# Altium PCB PIN_Diod.PcbDoc
Units mm, origin at the board's own origin, x right, y up, seen from the top; angles counter-clockwise.
Board outline 53 x 34 mm, 2 copper layers (Top Layer, Bottom Layer); 14 components, 7 nets, 44 pads, 4 vias.
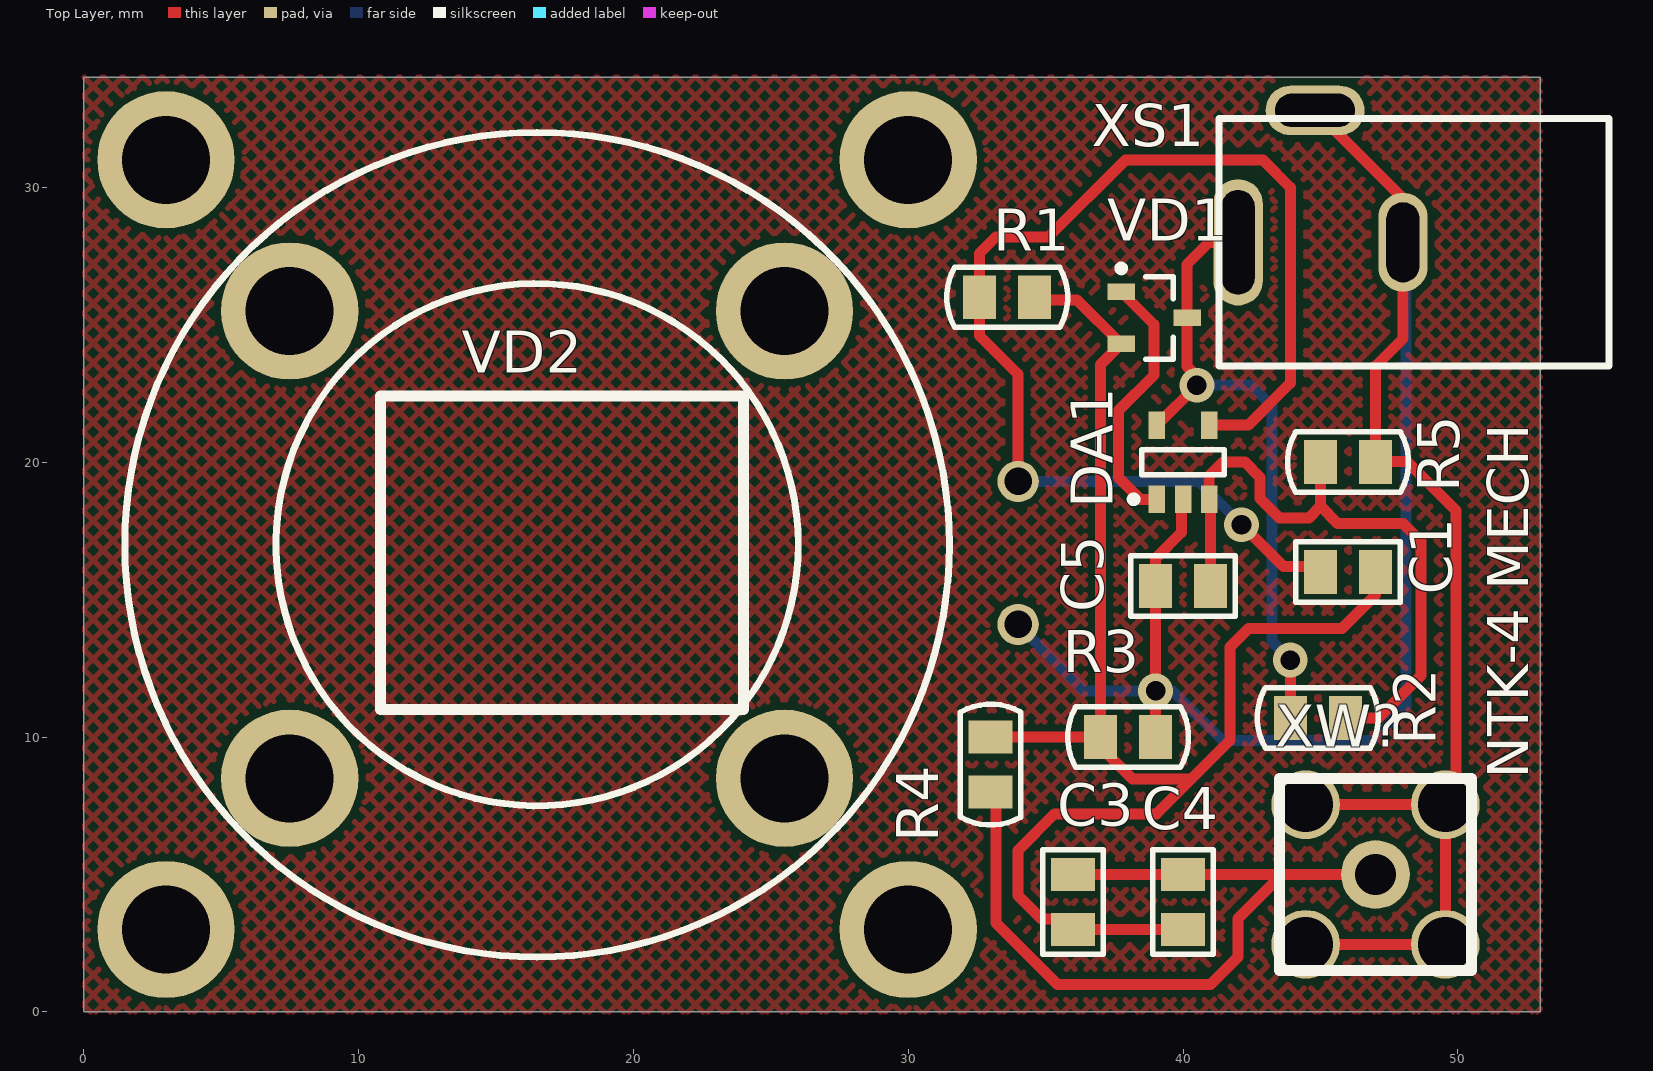
[diagram p0: Top Layer view]
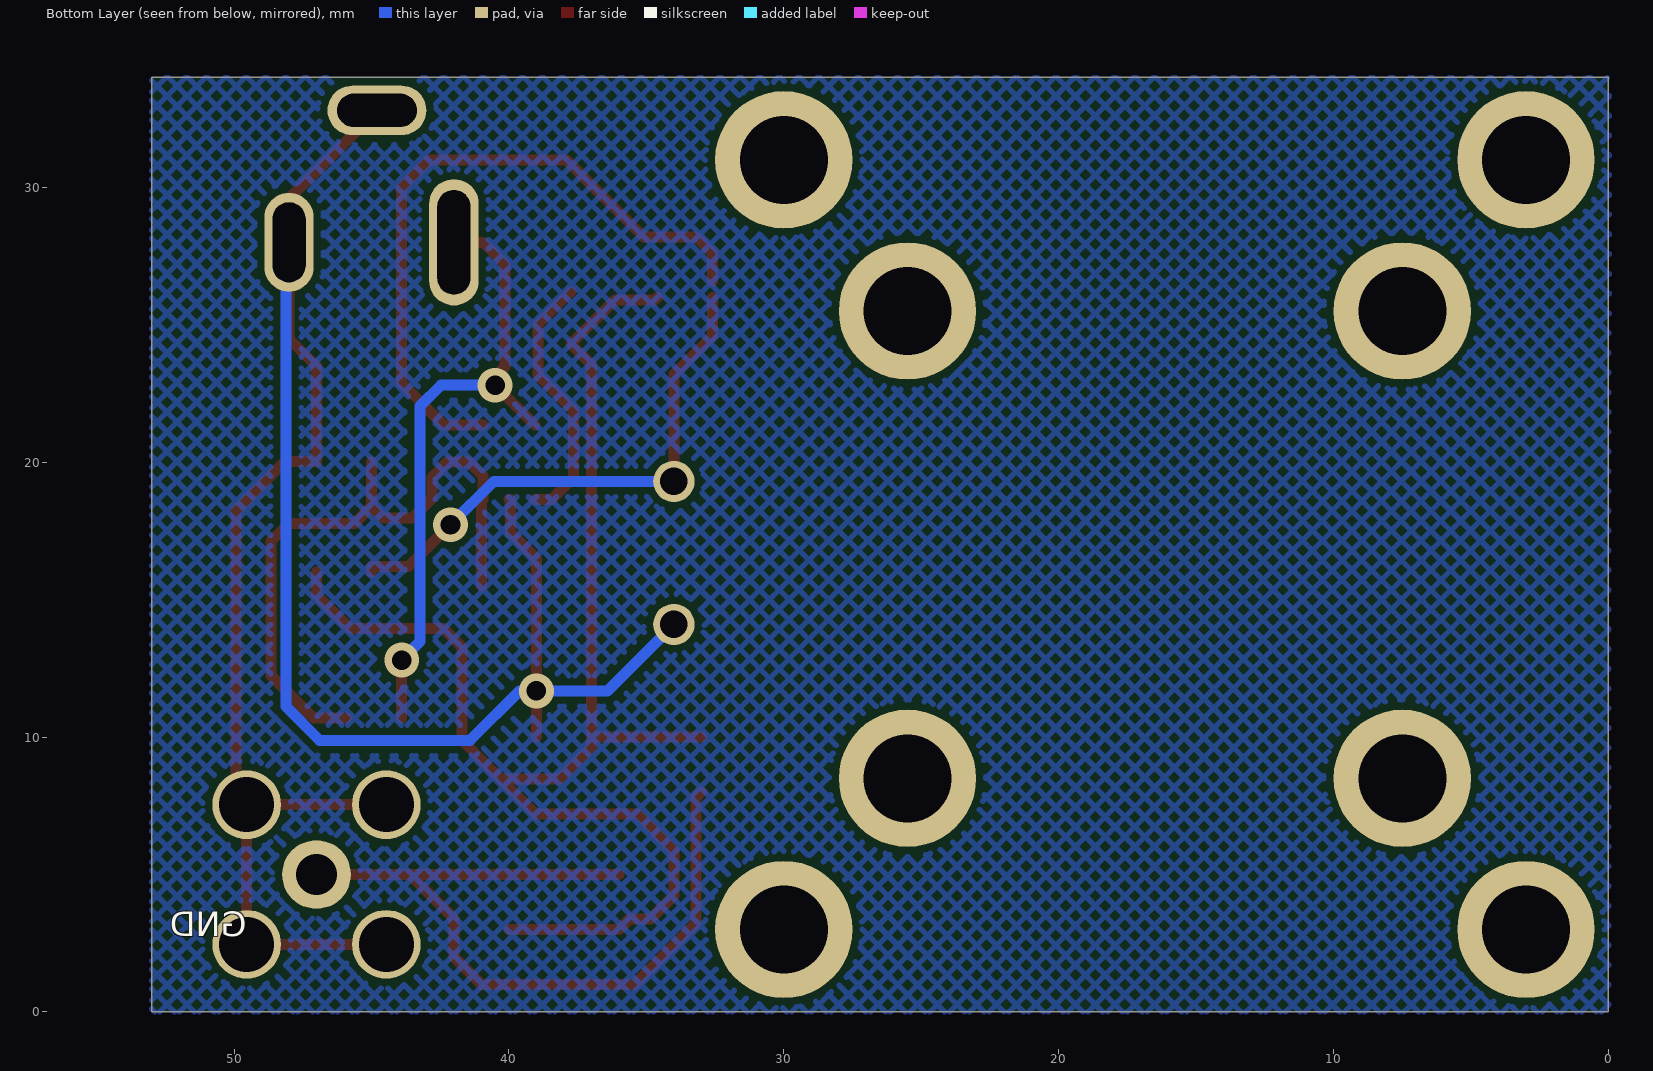
[diagram p1: Bottom Layer view, seen from below]
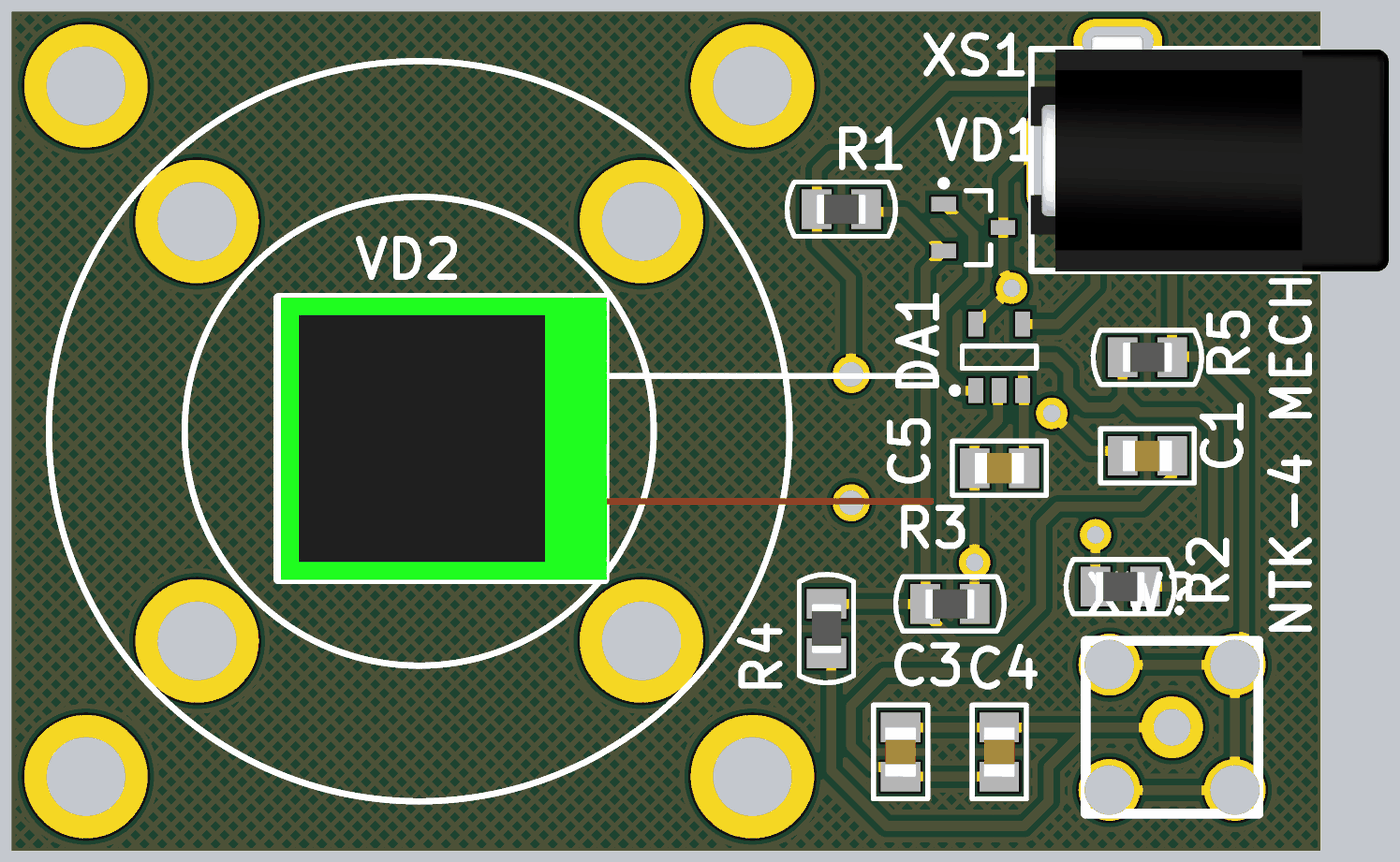
[diagram p2: 3D render of the assembled board from above, using the file's embedded part models]

## Layer stack, top to bottom
Top Solder: solder mask 0.0102, Solder Resist, Dk 3.5
Top Layer: signal copper 0.0356
Dielectric 1: dielectric 0.32, FR-4, Dk 4.8
Bottom Layer: signal copper 0.0356
Bottom Solder: solder mask 0.0102, Solder Resist, Dk 3.5

## Board outline
0,0 0,34 53,34 53,0

## Design rules (kind name [scope] priority, off if disabled: settings)
Clearance [All] p1: gap=0.254 ignorepadtopadclearanceinfootprint=FALSE except(0: Arc-Hole Track-Hole SMDPad-Hole THPad-Hole Via-Hole Fill-Hole Poly-Hole Region-Hole Text-Hole)
PolygonConnect [All] p1: connectstyle=Relief reliefconductorwidth=0.254 reliefentries=4 polygonreliefangle="90 Angle" airgapwidth=0.254
RoutingVias [All] p1: holewidth=0.711 width=1.27 viastyle="Through Hole" minholewidth=0.711 minwidth=1.27 maxholewidth=0.711 maxwidth=1.27
SolderMaskExpansion [All] p1: expansion=0.102 istentingtop=FALSE
Width [All] p1: maxlimit=0.5 minlimit=0.4 preferedwidth=0.4 minimp=50.000000 maximp=50.000000 favimp=50.000000
30 further rules are at their usual default settings.

## Components (designator, comment, footprint, x,y, rotation, side; value= is the part's Value field where it differs from the comment)
C1 "4,7pF" C0805 46,16 r0 top
C3 "68nF" C0805 36,4 r90 top
C4 "10uF" C0805 40,4 r90 top
C5 "330nF" C0805 40,15.5 r0 top
DA1 "AD8065ARTZ-REEL7" AD8065ARTZ-REEL7 40,20 r90 top
R1 "R" R0805 33.6,26 r0 top
R2 "R" R0805 44.9,10.7 r180 top
R3 "R" R0805 38,10 r180 top
R4 "R" R0805 33,9 r270 top
R5 "R" R0805 46,20 r180 top
VD1 "MMBT3904LT1G" MMBT3904LT1G 38.95,25.25 r0 top
VD2 "FDS1010" FDS1010 24,11 r90 top
XS1 "POWER DS-210" "POWER DS-210" 41.3,23.5 r0 top
XW? "SMA" "SMA HYR-1141 (GSA-1141)" 47,5 r90 top

## Footprints (in the part's own frame and the unit in brackets; to place one, negate y for a bottom-side part, rotate by r counter-clockwise, add the part's x,y. Pads: shape width x height; smd on the part's side, far side on the other; paste and mask are expansions set on the pad)
AD8065ARTZ-REEL7 [mm] "SOT23, 5-Leads, Body 2,90x2,80mm, Pitch 0,95mm, IPC Medium Density"
  rect 1x0.6 smd: 1(-1.35,0.95) 2(-1.35,0) 3(-1.35,-0.95) 4(1.35,-0.95) 5(1.35,0.95)
  silkscreen extent -1.47,-1.5 0.45,1.92, body extent -0.85,-1.5 0.85,1.5, height 1.45
C0805 [mm] "2012M"
  rect 1.2x1.6 smd: 1(-1,0) 2(1,0)
  silkscreen extent -1.9,-1.1 1.9,1.1, body extent -1,-0.62 1,0.63, height 1.01
FDS1010 [mm]
  round 1.5 hole 1: 1(3.1,-10) 2(8.3,-10)
  silkscreen extent 0,0 11.4,13.2, body extent -0.01,-13.31 11.42,13.1, height 1.19
MMBT3904LT1G [mm] "SOT23, 3-Leads, Body 2,92x2,37mm, Pitch 0,95mm, IPC Medium Density"
  rect 1x0.6 smd: 1(-1.2,0.95) 2(-1.2,-0.95) 3(1.2,0)
  silkscreen extent -1.32,-1.5 0.7,1.92, body extent -0.7,-1.52 0.7,1.52, height 1.11
"POWER DS-210" [mm]
  oval 1.8x4.6 hole 1.2 slot 3.8 at 90 deg: 1(0.702,4.5)
  oval 1.8x3.6 hole 1.2 slot 2.9 at 90 deg copper offset 0.001,0: 2(6.7,4.5)
  oval 3.6x1.8 hole 1.2 slot 2.9 at 0 deg copper offset 0.001,-0.001: 3(3.5,9.3)
  silkscreen extent 0,0 14.2,9, body extent -0.02,-0.03 14.48,9.52, height 11.5
R0805 [mm] "2012M"
  rect 1.2x1.6 smd: 1(-1,0) 2(1,0)
  silkscreen extent -2.2,-1.1 2.2,1.1, body extent -1,-0.6 1,0.6, height 0.5
"SMA HYR-1141 (GSA-1141)" [mm]
  round 2.5 hole 1.5: 1(0,0)
  round 2.5 hole 2: GND(-2.54,-2.54) GND(-2.54,2.54) GND(2.54,-2.54) GND(2.54,2.54)
  silkscreen extent -3.5,-3.5 3.5,3.5, body extent -3.54,-11.7 3.54,3.54, height 10

## Part data
C1 C3 C4 C5: library part C
XW?: library part "SMA HYR-1141 (GSA-1141)"
R1 R5: Ом=100k
R2: Ом=910k
R3: Ом=470
R4: Ом=0

## Free pads (board coordinates)
  round 5 hole 3.2: ""(3,3) ""(3,31) ""(7.5,8.5) ""(7.5,25.5) ""(25.5,8.5) ""(25.5,25.5) ""(30,3) ""(30,31)

## Via types
v1: diameter 1.27, hole 0.711, Top Layer to Bottom Layer, 4 vias

## Nets (pads, with @x,y where several pads share a name; then routed paths per layer and width w, separated by ;. In a path a pad name is that pad's centre, name@x,y a point inside that pad or via, vN(x,y) a via of type N, cw(c..) or ccw(c..) an arc to the next point about the centre after c; other vN are vias at no path point)
GND: C5.1 DA1.2 R3.1 R5.1 VD2.1 XS1.2 XS1.3 | length 60.6
  Top Layer w0.4: R3.1 v1(39,11.68) 39,16.5 39.95,17.45 39.95,18.65 DA1.2 ; XS1.3 48,29.6 XS1.2 48,24.491 47,23.491 R5.1 ; R5.1@47,20.025 48.15,20.025 49.925,18.25
  Bottom Layer w0.4: VD2.1 36.42,11.68 v1(39,11.68) 39.62,11.68 41.417,9.883 46.883,9.883 48.114,11.114 48.114,27.886 XS1.2
NetC1_1: C1.1 DA1.4 R1.1 VD2.2 | length 44.6
  Top Layer w0.4: R1.1 32.6,24.6 34,23.2 VD2.2 ; R1.1@32.6,26.6 32.6,27.6 33.2,28.2 35.1,28.2 37.9,31 42.9,31 43.9,30 43.9,22.875 42.375,21.35 DA1.4 ; v1(42.126,17.726) 43.65,16.202 45,16.202 C1.1
  Bottom Layer w0.4: VD2.2 40.551,19.3 v1(42.126,17.726)
NetC1_2: C1.2 C3.1 C4.1 R1.2 R3.2 R4.1 VD1.2 | length 54.4
  Top Layer w0.4: R4.1 34.988,10 R3.2 ; R1.2 34.696,25.904 36.146,25.904 VD1.2 37,23.55 37,22 R3.2 ; C4.1 C3.1 35.612,3.388 34.844,3.388 34,4.232 34,5.881 35.329,7.21 39.027,7.21 40.297,8.48 ; C1.2 47,15.175 45.775,13.95 42.375,13.95 41.7,13.275 41.7,9.883 40.297,8.48 ; R3.2 37,9.643 38.163,8.48 40.297,8.48
NetC3_2: C3.2 C4.2 R4.2 XW?.1 | length 29.7
  Top Layer w0.4: R4.2 33.2,7.8 33.2,3.234 35.434,1 41,1 42,2 42,3.4 43.6,5 ; C3.2 37.985,5 C4.2 42,5 43.497,5 43.6,5 ; XW?.1 43.6,5
NetC5_2: C5.2 DA1.3 R2.1 R5.2 | length 23.8
  Top Layer w0.4: DA1.3 40.95,19.5 41.45,20 42.25,20 42.8,19.45 42.8,18.675 43.5,17.975 44.575,17.975 45,18.4 ; C5.2 DA1.3@41,18.65 ; R5.2 45,18.4 ; R2.1 47.114,10.7 48.65,12.236 48.65,17.125 48,17.775 45.625,17.775 45,18.4
NetDA1_1: DA1.1 VD1.1 | length 9.5
  Top Layer w0.4: VD1.1 38.95,25 38.95,23.175 37.654,21.879 37.654,19.446 38.45,18.65 DA1.1
NetDA1_5: DA1.5 R2.2 VD1.3 XS1.1 | length 23.4
  Top Layer w0.4: DA1.5 v1(40.5,22.8) 40.5,23.125 40.15,23.475 VD1.3 40.15,27.2 40.95,28 XS1.1 ; R2.2 v1(43.9,12.8)
  Bottom Layer w0.4: v1(40.5,22.8) 42.472,22.8 43.228,22.044 43.228,13.472 v1(43.9,12.8)
pads on no net: XW?.GND
copper on no net: | length 25.6
  Top Layer w0.4: 44.46,2.46 49.54,2.46 49.54,7.54 44.46,7.54 ; 49.925,7.925 49.925,18.25

## Polygon pours and split planes (outlines as drawn)
no net on Top Layer "NONET_L01_P001" (hatched 45Degree grid 0.508 track 0.203, pour order 1): -0.025,34 0.05,33.925 0.05,0.025 0.075,0 53,0 53,33.989 52.999,33.99
no net on Bottom Layer "NONET_L02_P003" (hatched 45Degree grid 0.508 track 0.203, pour order 3): 0,0 53,0 53,33.989 -0.014,33.989 -0.025,34

## Silkscreen, mask and mechanical layers (free items; w line width, h text height)
Top Overlay:
  circle w0.254: c16.5,17 r9.5
  circle w0.254: c16.5,17 r15
  text "NTK-4 MECH" at 52.55,8.475 h1.5 r90
Bottom Overlay:
  text "GND" at 49.54,2.461 h1.52
Mechanical 4:
  the board outline again, w0.3